# EAGLE board lightmeter_7_DIY (EAGLE 9.6.2)
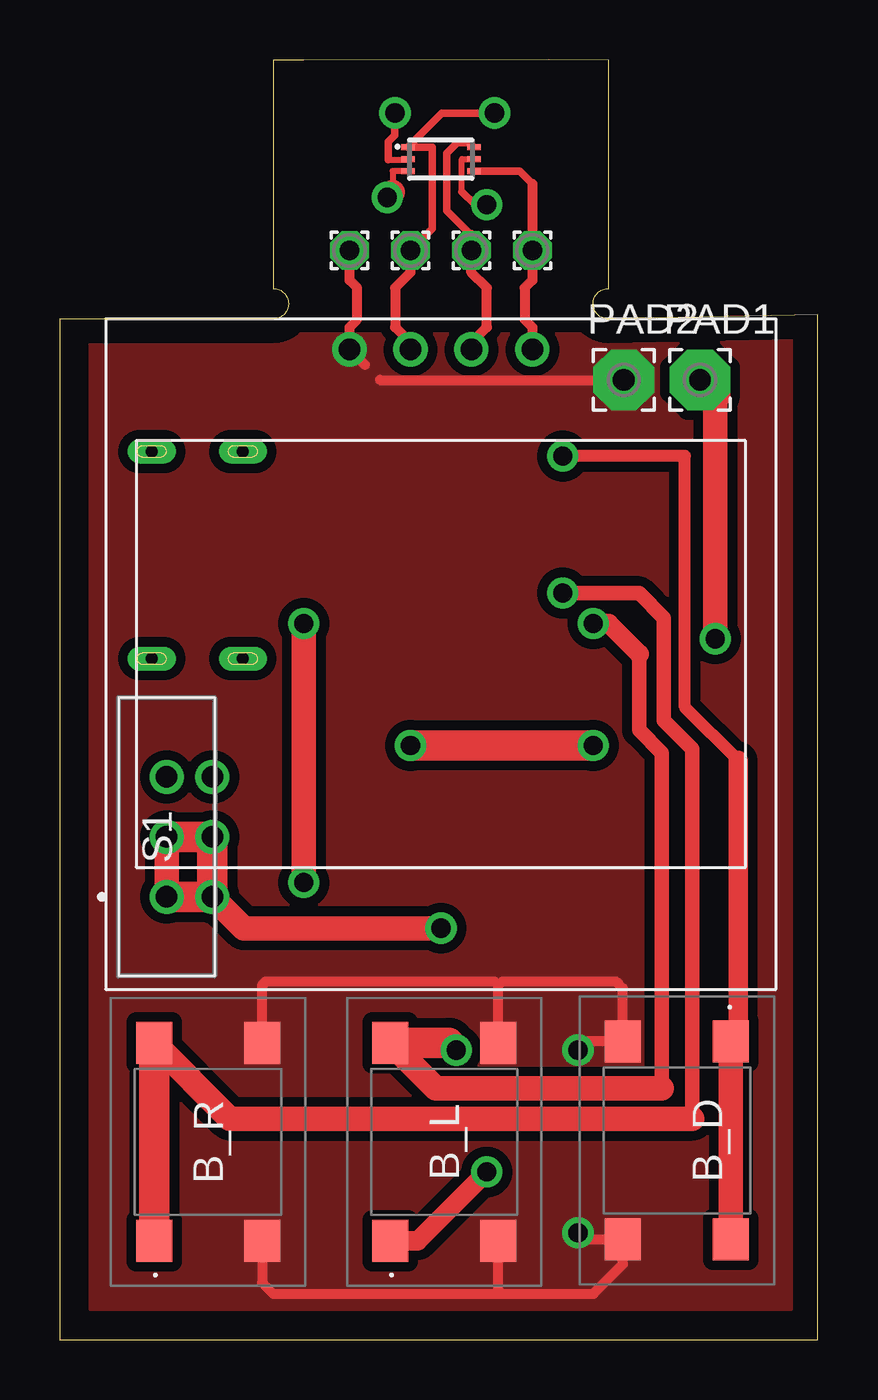
[diagram p0: board, top side]
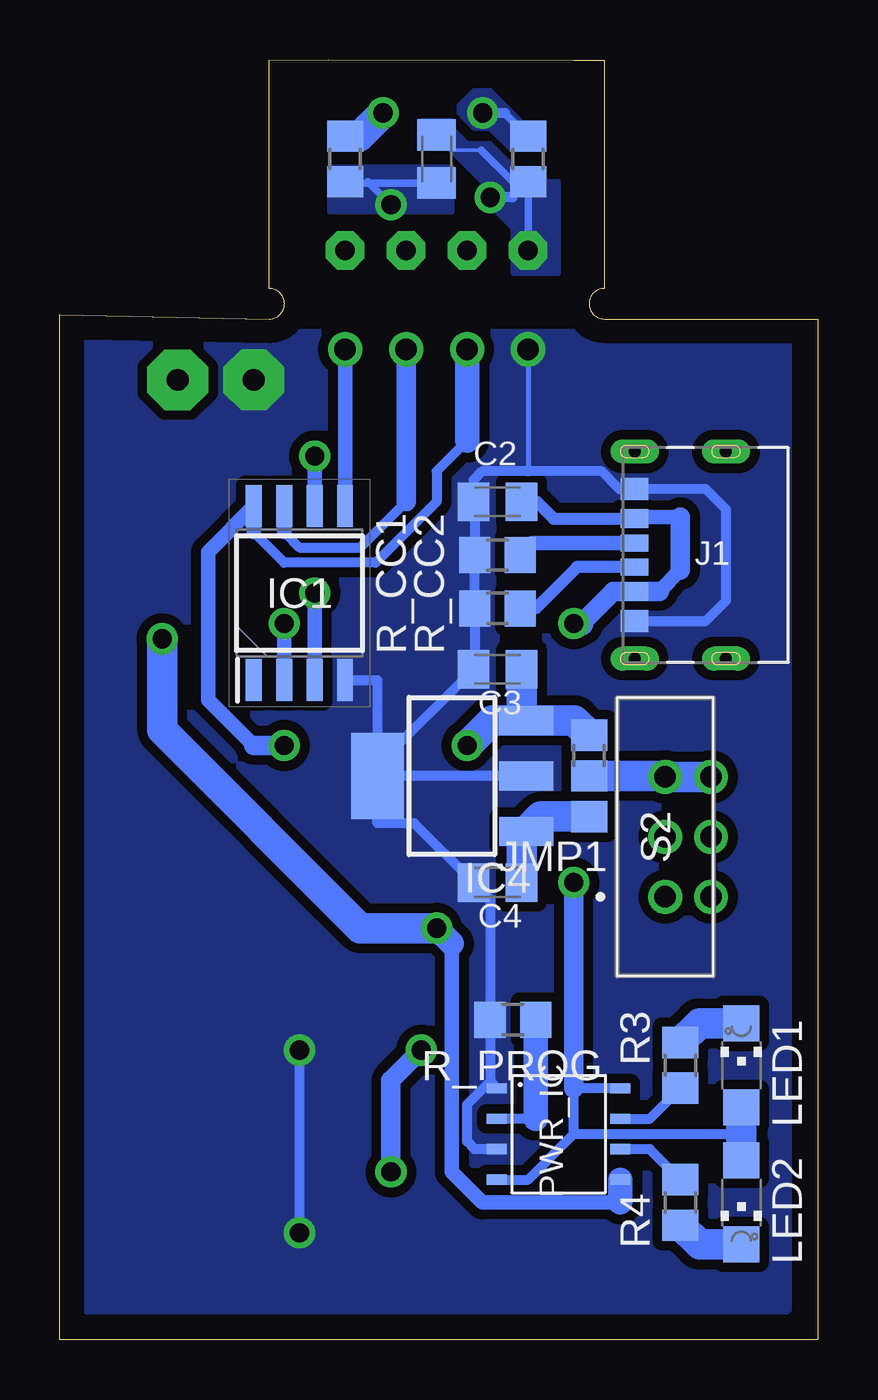
[diagram p1: board, bottom side, seen from below]

Size 31.57 x 53.34 mm. Coordinates in mm from the lower left corner, seen from the top.
Outline: 0,0 31.57,0 31.57,42.72 22.86,42.55 arc-182 22.86,43.81 22.86,53.34 20.37,53.34 10.16,53.34 8.89,53.34 8.89,43.81 arc-180 8.89,42.55 0,42.55 0,0
Copper layers (1*16): Top 0.035mm / dielectric 1.5mm / Bottom 0.035mm
Design rules "default *": minimum track width 0.2mm, minimum drill 0.8mm, track to track 0.2mm, track to pad 0.2mm, pad to pad 0.2mm, via to via 0.2mm, smd to smd 0.2mm, copper to edge 1mm, drill to drill 1mm, minimum pad ring 10mil, minimum via ring 8mil, stop-mask expansion 4mil, vias tented up to drill 0mil, thermal gap 10mil

## Footprints (pad centres in the part's own frame; a part is rotated, then mirrored left to right if it is on the bottom)
1,6/0,8 = drill 0.813 pad 1.6 octagon: 1 0,0
TS056650BK260SMT67 = smd 1.75 x 1.5: 1 -4.125,2.25; 2 -4.125,-2.25; 3 4.125,2.25; 4 4.125,-2.25
C0805K = smd 1.3 x 1.6: 1 -1,0; 2 1,0
SOIC127P798X216-8N = smd 1.75 x 0.65: 1 -3.625,1.905; 2 -3.625,0.635; 3 -3.625,-0.635; 4 -3.625,-1.905; 5 3.625,-1.905; 6 3.625,-0.635; 7 3.625,0.635; 8 3.625,1.905
WSOF6 = smd 0.55 x 0.25: 1 -1.375,0.5; 2 -1.375,0; 3 -1.375,-0.5; 4 1.375,-0.5; 5 1.375,0; 6 1.375,0.5
SOT223 = smd 1.219 x 2.235: 1 -2.311,-3.099; 2 0,-3.099; 3 2.311,-3.099 | smd 3.6 x 2.2: 4 0,3.099
CUI_UJC-HP-3-SMT-TR = smd 0.7 x 1.15: A5 -0.5,0.005; B5 0.5,0.005 | smd 0.8 x 1.15: A9 1.52,0.005; B9 -1.52,0.005 | smd 0.9 x 1.15: A12 2.75,0.005; B12 -2.75,0.005 | drill 0.5 pad 1 long: S1 -4.32,0; S2 4.32,0; S3 -4.32,-3.8; S4 4.32,-3.8
B0R-JMP = smd 1.5 x 1.3: 1 0,1.7; 2 0,0; 3 0,-1.7
CHIPLED_1206 = smd 1.5 x 1.5: A 0,-1.75; C 0,1.75
2,54/0,9 = drill 0.914 pad 2.54 octagon: 1 0,0
SOT23-8 = smd 0.42 x 0.835: 1 -1.905,-2.58; 2 -0.635,-2.58; 3 0.635,-2.58; 4 1.905,-2.58; 5 1.905,2.58; 6 0.635,2.58; 7 -0.635,2.58; 8 -1.905,2.58
R0805 = smd 1.3 x 1.5: 1 -0.95,0; 2 0.95,0
MINISPDTSW = drill 0.9 pad 1.4: 1 -2.5,0; 2 0,0; 3 2.5,0
I2C_OLED_128X64_BREAKOUT = drill 0.9 pad 1.422: GND -10.16,1.27; SCL -15.24,1.27; SDA -17.78,1.27; VCC -12.7,1.27

## Placement (x,y rotation side)
3V3  [1,6/0,8]  14.61,45.4 0 top
B_D  TS05-66-50-BK-260-SMT-67  [TS056650BK260SMT67]  25.71,8.3 270 top
B_L  TS05-66-50-BK-260-SMT-67  [TS056650BK260SMT67]  16.02,8.24 90 top
B_R  TS05-66-50-BK-260-SMT-67  [TS056650BK260SMT67]  6.17,8.24 90 top
C1  0.1uF  [C0805K]  15.88,49.21 90 bottom
C2  0.1uF  [C0805K]  13.34,34.92 0 bottom
C3  0.1uF  [C0805K]  13.34,27.94 180 bottom
C4  0.1uF  [C0805K]  13.34,19.05 180 bottom
GND_C  [1,6/0,8]  12.06,45.4 0 top
IC1  ATTINY85-20SU  [SOIC127P798X216-8N]  21.59,31.11 90 bottom
IC2  BH1750FVI-TR  [WSOF6]  15.88,49.21 0 top
IC4  [SOT223]  15.24,23.5 90 bottom
J1  UJC-HP-3-SMT-TR  [CUI_UJC-HP-3-SMT-TR]  7.62,32.7 90 bottom
JMP1  0R-JUMPB  [B0R-JMP]  9.53,23.5 180 bottom
LED1  [CHIPLED_1206]  3.18,11.43 0 bottom
LED2  [CHIPLED_1206]  3.18,5.71 180 bottom
PAD1  [2,54/0,9]  26.67,40 0 top
PAD2  [2,54/0,9]  23.5,40 0 top
PWR_IC  TP4056  [SOT23-8]  10.79,8.57 270 bottom
R3  1k  [R0805]  5.71,11.43 270 bottom
R4  1k  [R0805]  5.71,5.71 90 bottom
R_ADDR  4k7  [R0805]  12.06,49.21 90 bottom
R_CC1  5k1  [R0805]  13.34,30.48 180 bottom
R_CC2  5k1  [R0805]  13.34,32.7 180 bottom
R_DVI  1k  [R0805]  19.68,49.21 270 bottom
R_PROG  1k2  [R0805]  12.7,13.34 0 bottom
S1  MINI-SPDT-SW  [MINISPDTSW]  4.45,20.96 90 top
S2  MINI-SPDT-SW  [MINISPDTSW]  6.35,20.96 90 bottom
SCL  [1,6/0,8]  17.14,45.4 0 top
SDA  [1,6/0,8]  19.68,45.4 0 top
U$1  I2C_OLED_128X64  [I2C_OLED_128X64_BREAKOUT]  1.9,42.55 180 top

## Library data of the parts
3V3 GND_C PAD1 PAD2 SCL SDA = wirepad
B_D B_L B_R = SamacSys_Parts; DESCRIPTION: Tactile Switches 6 x 6 mm, 5 mm Act Height, 260 gf, Black, Surface Mount, IP67, SPST,; HEIGHT: 5.2mm; MANUFACTURER_NAME: CUI Inc.; MANUFACTURER_PART_NUMBER: TS05-66-50-BK-260-SMT-67; MOUSER_PART_NUMBER: 179-TS056650260SMT67; MOUSER_PRICE-STOCK: https://www.mouser.co.uk/ProductDetail/CUI-Devices/TS05-66-50-BK-260-SMT-67?qs=A6eO%252BMLsxmTTpMlvA87NHQ%3D%3D
C1-C4 = rcl; SPICEPREFIX: C
IC1 = SamacSys_Parts; DESCRIPTION: MICROCHIP - ATTINY85-20SU - MICROCONTROLLER MCU, 8 BIT, ATTINY, 20MHZ, SOIC-8; HEIGHT: 2.16mm; MANUFACTURER_NAME: Microchip; MANUFACTURER_PART_NUMBER: ATTINY85-20SU; MOUSER_PART_NUMBER: 556-ATTINY85-20SU; MOUSER_PRICE-STOCK: https://www.mouser.co.uk/ProductDetail/Microchip-Technology-Atmel/ATTINY85-20SU?qs=8jWQYweyg6N%2FGXnwAe4Icw%3D%3D
IC2 = SamacSys_Parts; DESCRIPTION: Ambient Light Sensor,16bit,I2C,WSOF6I ROHM BH1750FVI-TR Ambient Light Sensor Unit Surface Mount; HEIGHT: mm; MANUFACTURER_NAME: ROHM Semiconductor; MANUFACTURER_PART_NUMBER: BH1750FVI-TR; MOUSER_PART_NUMBER: 755-BH1750FVI-TR; MOUSER_PRICE-STOCK: https://www.mouser.co.uk/ProductDetail/ROHM-Semiconductor/BH1750FVI-TR?qs=phc6PQ%252BTPUNy88lRCs6mVA%3D%3D
IC4 = linear-technology; MPN: LT1129CST-5#PBF; OC_FARNELL: 1663375; OC_NEWARK: 57M2069
J1 = UJC-HP-3-SMT-TR; AVAILABILITY: In Stock; CUI_PURCHASE_URL: https://www.cuidevices.com/product/interconnect/connectors/usb-connectors/ujc-hp-3-smt-tr?utm_source=snapeda.com&utm_medium=referral&utm_campaign=snapedaBOM; DESCRIPTION: Type C, 3 A, Right Angle, Surface Mount (SMT), Power-Only USB Receptacle; MF: CUI Devices; MP: UJC-HP-3-SMT-TR; PACKAGE: None; PRICE: None; PURCHASE-URL: https://pricing.snapeda.com/search/part/UJC-HP-3-SMT-TR/?ref=eda
JMP1 = jump-0r-smd
LED1 LED2 = led
PWR_IC = tp4056
R3 R4 R_ADDR R_CC1 R_CC2 R_DVI R_PROG = rcl; SPICEPREFIX: R
S1 S2 = SamacSys_Parts; DESCRIPTION: Slide Switches MINI SPDT SWITCH; HEIGHT: mm; MANUFACTURER_NAME: Gravitech; MANUFACTURER_PART_NUMBER: MINI-SPDT-SW; MOUSER_PART_NUMBER: 992-MINI-SPDT-SW; MOUSER_PRICE-STOCK: https://www.mouser.co.uk/ProductDetail/Gravitech/MINI-SPDT-SW?qs=Vxac6xGyzPm8ENq695r3yA%3D%3D
U$1 = my_breakouts

## Nets
3V3: 3V3.1 C3.1 IC1.8 IC2.1 IC4.3 JMP1.3 R_DVI.1 U$1.VCC
5V: C2.2 J1.A9 J1.B9 LED1.A LED2.A PWR_IC.4 PWR_IC.8
BTN_D: B_D.1 B_D.3 IC1.6
BTN_L: B_L.1 B_L.3 IC1.2
BTN_R: B_R.1 B_R.3 IC1.3
GND: B_D.2 B_D.4 B_L.2 B_L.4 B_R.2 B_R.4 C1.2 C2.1 C3.2 C4.2 GND_C.1 IC1.4 IC2.3 IC4.2 IC4.4 J1.A12 J1.B12 PAD2.1 PWR_IC.1 PWR_IC.3 R_ADDR.1 R_CC1.2 R_CC2.2 R_PROG.1 U$1.GND
N$1: C1.1 IC2.5 R_DVI.2
N$2: IC2.2 R_ADDR.2
N$3: J1.B5 R_CC2.1
N$4: PWR_IC.6 R4.2
N$5: PWR_IC.7 R3.2
N$6: LED2.C R4.1
N$7: LED1.C R3.1
N$8: J1.A5 R_CC1.1
N$9: PWR_IC.2 R_PROG.2
N$11: C4.1 IC4.1 JMP1.1
RST: IC1.1
SCL: IC1.7 IC2.6 SCL.1 U$1.SCL
SDA: IC1.5 IC2.4 SDA.1 U$1.SDA
VCC: PAD1.1 PWR_IC.5 S1.1 S1.2 S2.1 S2.2
VCC_ON: JMP1.2 S1.3 S2.3

## Tracks (layer width: path | path; a pad name or v marks a point on that pad's centre or on a via)
3V3  (via drill 0.8 pad 1.3)
  Top 0.305: v18.11,51.13 15.92,51.13 IC2.1 15.52,49.71 15.52,46.31 3V3.1
  Top 0.406: 3V3.1 14.61,44.48 13.96,43.84 13.96,42.2 14.61,41.56 U$1.VCC
  Top 1.27: v22.23,24.77 v14.61,24.77
  Bottom 0.152: R_DVI.1 19.08,50.16
  Bottom 0.203: R_DVI.1 19.68,50.48
  Bottom 0.406: 14.61,37.47 15.88,36.19 15.88,34.92 18.41,32.39 22.23,32.39 23.5,33.66 | U$1.VCC 14.61,40.64 | IC4.3 12.34,26
  Bottom 0.61: 23.5,33.66 IC1.8 25.4,32.83 25.4,26.67 23.5,24.77
  Bottom 0.813: v22.23,24.77 23.5,24.77
  Bottom 1.016: U$1.VCC 14.61,37.47
  Bottom 1.27: 19.08,50.16 v18.11,51.13 | 12.34,26 C3.1 | v14.61,24.77 13.56,25.81 IC4.3 10.14,25.81 JMP1.3
5V  (via drill 0.8 pad 1.3)
  Top 1.016: v10.16,29.85 v10.16,19.05
  Bottom 0.406: C2.2 11.7,34.92 | J1.A9 7.56,34.29 | 10.16,8.57 3.18,8.57 | 10.16,8.57 10.16,10.48 PWR_IC.8 | PWR_IC.4 12.06,6.67 10.16,8.57
  Bottom 0.508: 11.7,34.92 11,34.22 J1.A9
  Bottom 0.61: 7.56,34.29 5.71,34.29 | 5.71,32.07 6.6,31.18
  Bottom 0.813: 5.71,34.29 5.71,32.07 | 6.6,31.18 J1.B9 8.5,31.18 9.84,29.85 | 10.16,10.48 v10.16,19.05
  Bottom 1.016: 9.84,29.85 v10.16,29.85
  Bottom 1.27: LED2.A 3.18,8.57 LED1.A
BTN_D  (via drill 0.8 pad 1.3)
  Top 0.406: B_D.1 27.96,12.47 28.26,12.77
  Top 0.508: 28.26,24.13 26.04,26.35 26.04,36.83 v20.95,36.83
  Top 0.813: 28.26,12.77 28.26,24.13
  Top 1.016: B_D.1 B_D.3
  Bottom 0.61: IC1.6 v20.95,36.83
BTN_L  (via drill 0.8 pad 1.3)
  Top 0.61: 24.13,28.57 24.13,25.4 25.08,24.45 25.08,10.48
  Top 0.813: 24.13,28.57 22.86,29.85 v22.23,29.85 | B_L.1 14.91,4.12 v17.78,6.98
  Top 1.016: B_L.3 15.65,10.48 25.08,10.48 | v16.51,12.07 16.21,12.37
  Top 1.27: B_L.3 16.21,12.37
  Bottom 0.61: IC1.2 v22.23,29.85
  Bottom 0.813: v16.51,12.07 17.78,10.8 v17.78,6.98
BTN_R  (via drill 0.8 pad 1.3)
  Top 0.61: 26.35,9.21 26.35,24.61 25.16,25.8 25.16,30.09 24.13,31.11 v20.95,31.11
  Top 1.016: B_R.3 7.08,9.21 26.35,9.21
  Top 1.27: B_R.3 B_R.1
  Bottom 0.61: IC1.3 v20.95,31.11
GND  (via drill 0.8 pad 1.3)
  Top 0.254: IC2.3 13.87,48.71 13.87,47.84
  Top 0.406: B_R.4 8.42,14.77 8.57,14.92 18.1,14.92 18.27,14.75 | B_L.4 18.27,14.75 | 12.7,40.64 U$1.GND 12.06,42.2 12.39,42.52 12.39,43.84 12.06,44.16 GND_C.1 | 18.27,14.75 18.43,14.92 23.18,14.92 23.46,14.64 B_D.2 21.95,12.43 v21.59,12.07 | B_R.2 8.42,2.37 8.89,1.91 18.41,1.91 | 18.41,1.91 22.23,1.91 23.46,3.14 B_D.4 21.86,4.18 v21.59,4.45 | 18.41,1.91 18.27,2.05 B_L.2 | 13.34,40 PAD2.1
  Top 1.016: 13.87,47.84 v13.64,47.61
  Bottom 0.152: C1.2 15.24,49.58 14.02,49.58
  Bottom 0.2: U$1.GND 12.06,36.19
  Bottom 0.305: R_ADDR.1 12.7,48.26 14.02,49.58 | GND_C.1 R_ADDR.1 | R_ADDR.1 12.71,47.61
  Bottom 0.406: PWR_IC.1 13.65,10.75 | 13.65,10.75 R_PROG.1 13.65,18.36 C4.2 16.8,21.51 18.34,21.51 IC4.4 | PWR_IC.3 14.29,7.94 14.61,8.26 14.61,9.8 13.65,10.75 | J1.B12 7.7,29.88 | 7.52,29.85 J1.B12 | J1.B12 4.65,29.95 3.81,30.8 3.81,34.61 4.65,35.45 J1.A12 8.26,35.45 9,36.19 12.06,36.19 13.97,36.19 14.34,35.83 C2.1 14.29,34.88 R_CC2.2 R_CC1.2 14.29,27.99 C3.2 18.14,24.13 18.34,24.13 | 12.71,47.61 v13.64,47.61 | v21.59,12.07 v21.59,4.45 | IC1.4 18.34,27.49 18.34,24.13 | 18.34,24.13 IC4.4 | IC4.2 IC4.4
  pour Top (isolate 0.406, no thermals): 1.27,41.91 30.48,41.91 30.48,1.27 1.27,1.27
  pour Bottom (isolate 0.406, no thermals): 1.27,41.91 30.48,41.91 30.48,1.27 1.27,1.27
  pour Bottom (no thermals): 12.7,44.45 10.79,44.45 10.79,48.26 12.06,48.26 13.65,49.85 14.61,49.85 15.24,50.48 15.24,50.8 16.51,50.8 16.51,49.85 15.56,49.85 13.97,48.26 13.97,47.62 12.7,46.36
N$1  (via drill 0.8 pad 1.3)
  Top 0.254: 16.75,47.86 16.75,49.21 IC2.5
  Top 0.305: v17.78,47.31 17.3,47.31 16.75,47.86
  Bottom 0.152: 19.63,48.21 R_DVI.2 18.73,48.26
  Bottom 0.305: C1.1 19.63,48.21 | 18.73,48.26 v17.78,47.31
  pour Bottom (no thermals): 15.24,46.99 20.32,46.99 20.32,48.89 15.24,48.89
N$2  (via drill 0.8 pad 1.3)
  Top 0.254: 13.68,49.17 14.5,49.17 IC2.2
  Top 0.305: 13.68,49.17 13.68,49.93 13.96,50.21 v13.96,51.13
  Bottom 0.305: R_ADDR.2 13.03,51.13
  Bottom 0.406: 13.03,51.13 v13.96,51.13
  pour Bottom (no thermals): 12.7,49.53 13.65,50.48 14.29,50.48 14.92,51.12 14.92,51.44 14.29,52.07 13.65,52.07 12.38,50.8 12.38,49.85
N$3
  Bottom 0.406: 11.88,33.2 R_CC2.1
  Bottom 0.61: J1.B5 11.88,33.2
N$4
  Bottom 0.406: R4.2 6.99,7.94 PWR_IC.6
N$5
  Bottom 0.406: PWR_IC.7 6.99,9.21 R3.2
N$6
  Bottom 1.27: R4.1 4.91,3.96 LED2.C
N$7
  Bottom 1.27: R3.1 4.91,13.18 LED1.C
N$8
  Bottom 0.508: J1.A5 10.03,32.2 11.75,30.48 R_CC1.1
N$9
  Bottom 0.406: 11.75,9.21 PWR_IC.2
  Bottom 1.016: R_PROG.2 11.75,9.21
N$11
  Bottom 0.406: IC4.1 12.34,20.99
  Bottom 1.27: JMP1.1 11.53,21.8 IC4.1 | 12.34,20.99 C4.1
SCL
  Top 0.305: IC2.6 17.08,49.88 16.56,49.88 16.12,49.44 16.12,47.06 17.14,46.04
  Top 0.406: 17.14,46.04 SCL.1 17.14,44.48 17.79,43.84 17.79,42.2 17.14,41.56 U$1.SCL
  Bottom 0.406: 22.23,33.66 21.59,33.02 19.05,33.02 17.14,34.92
  Bottom 0.61: IC1.7 22.23,33.66
  Bottom 0.813: U$1.SCL 17.14,34.92
SDA
  Top 0.305: IC2.4 19.16,48.71 19.68,48.18
  Top 0.406: 19.68,48.18 SDA.1 19.68,44.16 19.36,43.84 19.36,42.52 19.68,42.2 U$1.SDA
  Bottom 0.61: IC1.5 U$1.SDA
VCC  (via drill 0.8 pad 1.3)
  Top 1.016: v15.88,17.14 7.66,17.14 S2.1 | S1.2 S1.1 | 27.3,39.37 v27.3,29.21
  Top 1.27: S1.1 S2.1 S2.2 S1.2 | PAD1.1 27.3,39.37
  Bottom 0.61: 8.21,5.71 13.97,5.71 15.24,6.98 15.24,16.51
  Bottom 1.016: PWR_IC.5 8.21,5.71 | v15.88,17.14 15.24,16.51
  Bottom 1.27: v15.88,17.14 19.05,17.14 27.3,25.4 v27.3,29.21
VCC_ON
  Bottom 0.406: S2.3 6.39,23.5
  Bottom 1.27: 6.39,23.5 JMP1.2 | S1.3 S2.3